# Altium PCB PCBProjet.PcbDoc
Units mm, origin at the board's own origin, x right, y up, seen from the top; angles counter-clockwise.
Board outline 70.61 x 70.61 mm, 2 copper layers (Top Layer, Bottom Layer); 34 components, 27 nets, 125 pads, 0 vias.
Unrouted connection lines stored in the file: 80.
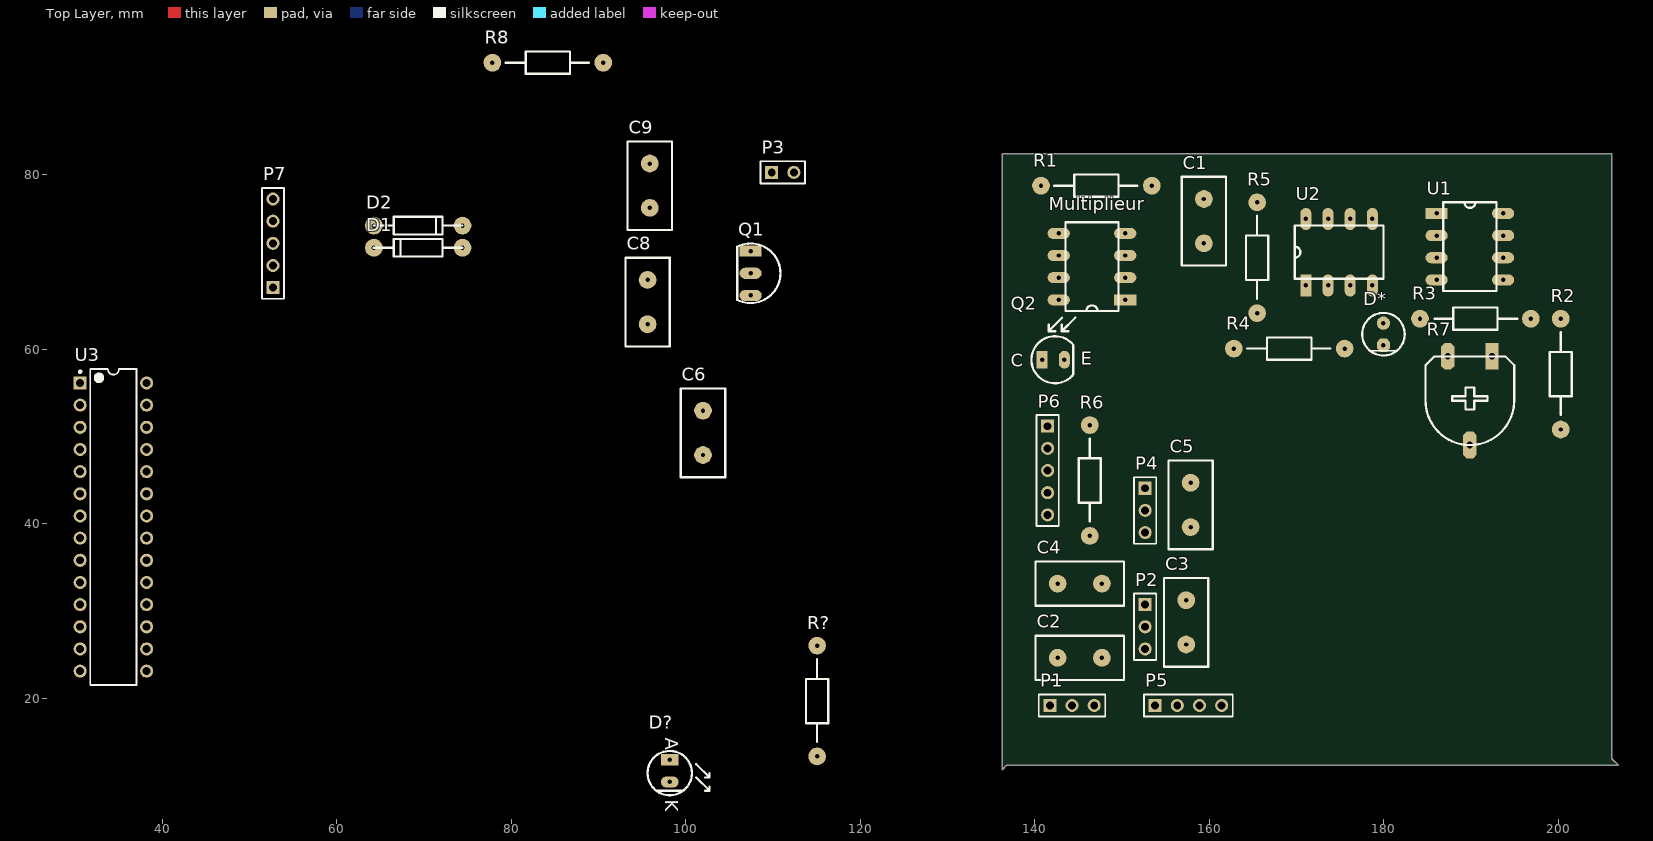
[diagram p0: Top Layer view]
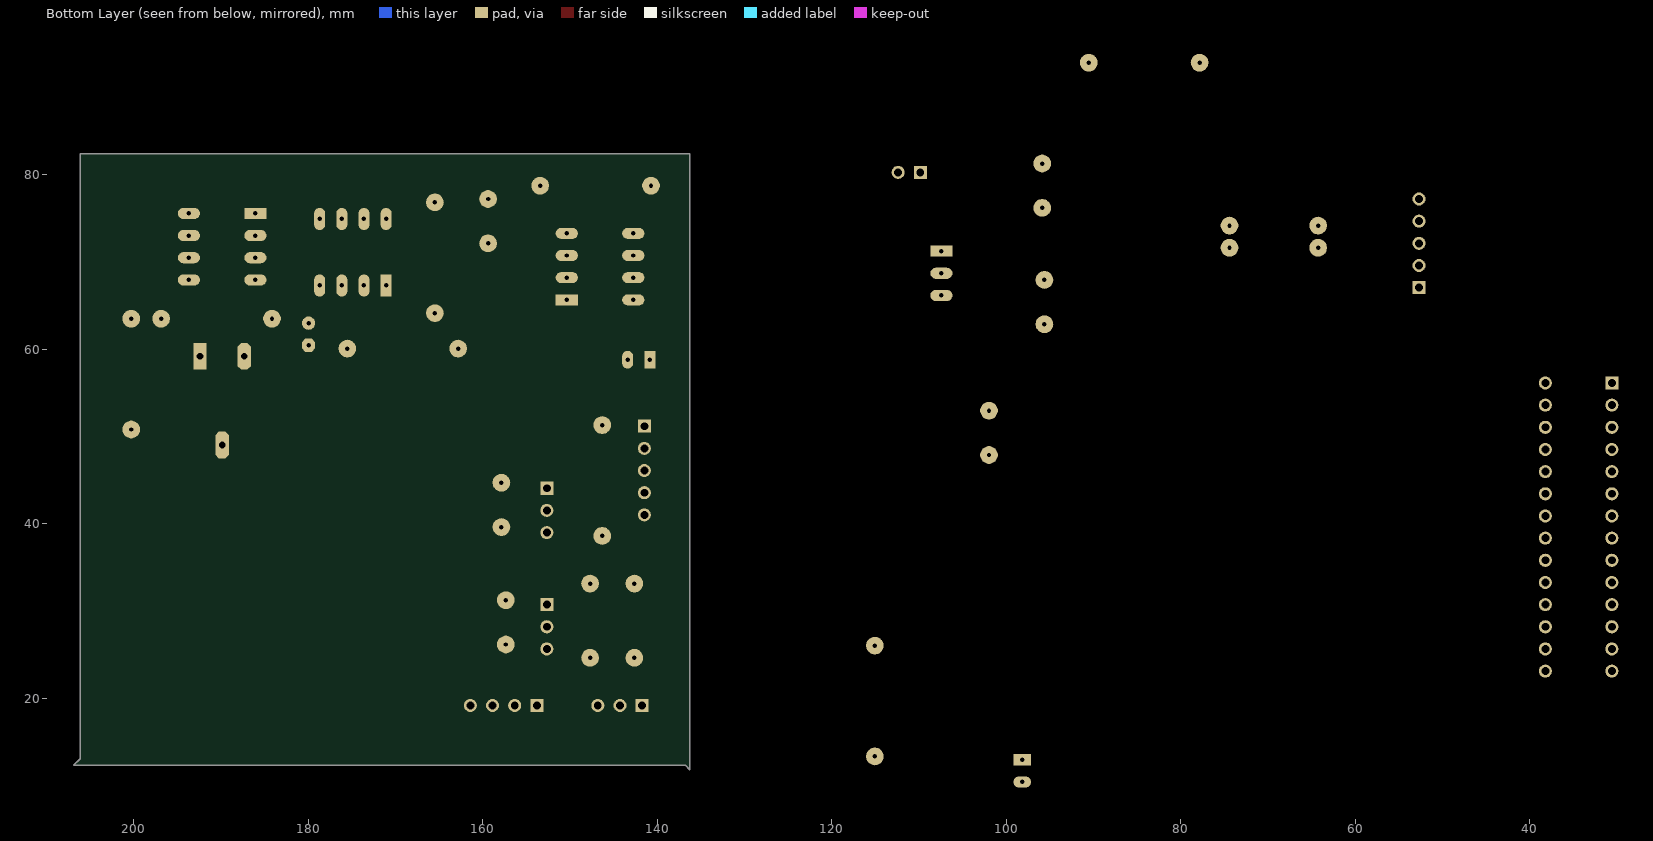
[diagram p1: Bottom Layer view, seen from below]

## Layer stack, top to bottom
Top Layer: signal copper 0.0356
Dielectric: dielectric 0.32, FR-4, Dk 4.8
Bottom Layer: signal copper 0.0356

## Board outline
136.271,82.423 136.271,11.811 136.779,12.319 206.883,12.319 206.121,13.081 206.121,82.423

## Design rules (kind name [scope] priority, off if disabled: settings)
Clearance [All] p1: gap=0.508
PolygonConnect [All] p1: connectstyle=Relief reliefconductorwidth=0.254 reliefentries=4 polygonreliefangle="90 Angle" airgapwidth=0.254
RoutingLayers [All] p1: top layer_v5=FALSE bottom layer_v5=TRUE
RoutingVias [All] p1: holewidth=0.711 width=1.27 viastyle="Through Hole" minholewidth=0.711 minwidth=1.27 maxholewidth=0.711 maxwidth=1.27
SilkscreenOverComponentPads [All] p1: minsilkscreentomaskgap=0.254
SolderMaskExpansion [All] p1: expansion=0.102
Width [All] p1: maxlimit=0.762 minlimit=0.762 preferedwidth=0.762
26 further rules are at their usual default settings.

## Components (designator, comment, footprint, x,y, rotation, side; value= is the part's Value field where it differs from the comment)
C1 "Cap2" CAPA2 159.385,72.136 r90 top
C2 "Cap2" CAPA2 147.701,24.638 r180 top
C3 "Cap2" CAPA2 157.353,31.242 r270 top
C4 "Cap2" CAPA2 147.701,33.147 r180 top
C5 "Cap2" CAPA2 157.861,44.704 r270 top
C6 "Cap2" CAPA2 101.981,47.879 r90 top
C8 "Cap2" CAPA2 95.631,62.865 r90 top
C9 "Cap2" CAPA2 95.885,76.2 r90 top
D1 "Diode 1N4001" Ddiode 64.262,71.628 r0 top
D2 "Diode 1N4001" Ddiode 74.422,74.168 r180 top
D* "LED" Led_5mm 179.832,61.722 r270 top
D? "Led" LED 98.171,12.954 r270 top
Multiplieur "AD633JN" DIP8 150.368,65.659 r180 top
P1 "Header 3" HDR1X3 141.732,19.177 r0 top
P2 "Regul5" HDR1X3 152.654,30.734 r270 top
P3 "Laser" HDR1X2 109.855,80.264 r0 top
P4 "Regul33" HDR1X3 152.654,44.069 r270 top
P5 "XBee" HDR1X4 153.797,19.177 r0 top
P6 "Moteur" HDR1X5 141.478,51.181 r270 top
P7 "PICKIT" HDR1X5 52.705,67.056 r90 top
Q1 "2N3904" TO92 107.442,71.247 r270 top
Q2 "TEFT4300" Photo 140.843,58.801 r0 top
R1 "Res2" res5_1/4W 140.716,78.74 r0 top
R2 "Res2" res5_1/4W 200.279,63.5 r270 top
R3 "Res2" res5_1/4W 196.85,63.5 r180 top
R4 "Res2" res5_1/4W 162.814,60.071 r0 top
R5 "Res2" res5_1/4W 165.481,76.835 r270 top
R6 "Res2" res5_1/4W 146.304,51.308 r270 top
R7 "RPot" AJUSTABLE 192.405,59.182 r180 top
R8 "Res2" res5_1/4W 77.851,92.837 r0 top
R? "Res2" res5_1/4W 115.062,26.035 r270 top
U1 "LM311N" DIP8 186.055,75.565 r0 top
U2 "TL082CN" DIP8 171.069,67.31 r90 top
U3 "DSPIC33FJ128MC802-I/SP" SPDIP300-SP28 34.417,39.624 r0 top

## Footprints (in the part's own frame and the unit in brackets; to place one, negate y for a bottom-side part, rotate by r counter-clockwise, add the part's x,y. Pads: shape width x height; smd on the part's side, far side on the other; paste and mask are expansions set on the pad)
AJUSTABLE [mil]
  rect 60x120 hole 30: 1(0,0)
  oct 60x120 hole 30: 2(100,400) 3(200,0)
  silkscreen extent -100,0 300,400
CAPA2 [mil]
  round 80 hole 20: 1(0,0) 2(200,0)
  silkscreen extent -100,-100 300,100
Ddiode [mil]
  round 80 hole 20: A(400,0) K(0,0)
  silkscreen extent 0,-40 400,40
DIP8 [mil]
  rect 100x50 hole 20: 1(0,0)
  oval 100x50 hole 20: 2(0,-100) 3(0,-200) 4(0,-300) 5(300,-300) 6(300,-200) 7(300,-100) 8(300,0)
  silkscreen extent 30,-350 270,50
HDR1X2 [mm] "Connector; Header; 2 Position"
  rect 1.5x1.5 hole 0.9: 1(0,0)
  round 1.5 hole 0.9: 2(2.54,0)
  silkscreen extent -1.27,-1.27 3.81,1.27
HDR1X3 [mm] "Connector; Header; 3 Position"
  rect 1.5x1.5 hole 0.9: 1(0,0)
  round 1.5 hole 0.9: 2(2.54,0) 3(5.08,0)
  silkscreen extent -1.27,-1.27 6.35,1.27
HDR1X4 [mm] "Connector; Header; 4 Position"
  rect 1.5x1.5 hole 0.9: 1(0,0)
  round 1.5 hole 0.9: 2(2.54,0) 3(5.08,0) 4(7.62,0)
  silkscreen extent -1.27,-1.27 8.89,1.27
HDR1X5 [mm] "Connector; Header; 5 Position"
  rect 1.5x1.5 hole 0.9: 1(0,0)
  round 1.5 hole 0.9: 2(2.54,0) 3(5.08,0) 4(7.62,0) 5(10.16,0)
  silkscreen extent -1.27,-1.27 11.43,1.27
LED [mil]
  rect 50x80 hole 20: 1(0,0)
  oval 50x80 hole 20: 2(100,0)
  silkscreen extent -40,-100 160,180
Led_5mm [mil]
  round 60 hole 20: 1(-50,5)
  oct 60x60 hole 20: 2(50,5)
  silkscreen extent -96,-91 96,101
Photo [mil]
  rect 50x80 hole 20: 1(0,0)
  oval 50x80 hole 20: 2(100.39,0)
  silkscreen extent -48,-106 150,190
res5_1/4W [mil]
  round 80 hole 20: 1(0,0) 2(500,0)
  silkscreen extent 60,-50 435,50
SPDIP300-SP28 [mm] "DIP, 28-Leads, Row Spacing 7.62mm, Pitch 2.54mm, Body 34.9x6.8mm"
  rect 1.5x1.5 hole 0.9: 1(-3.81,16.51)
  round 1.5 hole 0.9: 2(-3.81,13.97) 3(-3.81,11.43) 4(-3.81,8.89) 5(-3.81,6.35) 6(-3.81,3.81) 7(-3.81,1.27) 8(-3.81,-1.27) 9(-3.81,-3.81) 10(-3.81,-6.35) 11(-3.81,-8.89) 12(-3.81,-11.43) 13(-3.81,-13.97) 14(-3.81,-16.51) 15(3.81,-16.51) 16(3.81,-13.97) 17(3.81,-11.43) 18(3.81,-8.89) 19(3.81,-6.35) 20(3.81,-3.81) 21(3.81,-1.27) 22(3.81,1.27) 23(3.81,3.81) 24(3.81,6.35) 25(3.81,8.89) 26(3.81,11.43) 27(3.81,13.97) 28(3.81,16.51)
  silkscreen extent -3.93,-18.1 2.65,18.1, body extent -3.55,-18.1 3.55,18.1, height 5.08
TO92 [mil]
  rect 50x100 hole 20: 1(0,0)
  oval 50x100 hole 20: 2(100,0) 3(200,0)
  silkscreen extent -34,-60 234,134

## Part data
C1 C2 C3 C4 C5 C6 C8 C9: "Capacitor"
D1 D2: "1 Amp General Purpose Rectifier"
D?: "LED"
Multiplieur: "Low-Cost Analog Multiplier"
P1: "Header, 3-Pin"
P2 P4: library part "Header 3", "Header, 3-Pin"
P3: library part "Header 2", "Header, 2-Pin"
P5: library part "Header 4", "Header, 4-Pin"
P6 P7: library part "Header 5", "Header, 5-Pin"
Q1: "NPN General Purpose Amplifier"
Q2: "NPN Phototransistor"
R1 R2 R3 R4 R5 R6 R8 R?: "Resistor"
R7: "Potentiometer"
U1: "Voltage Comparator"
U2: "General-Purpose J-FET Dual Operational Amplifier"
U3: "High-Performance 16-bit Digital Signal Controller, 128 KB Flash, 16 KB RAM, 28-Pin SPDIP, Industrial Temperature"

## Nets (pads, with @x,y where several pads share a name; then routed paths per layer and width w, separated by ;. In a path a pad name is that pad's centre, name@x,y a point inside that pad or via, vN(x,y) a via of type N, cw(c..) or ccw(c..) an arc to the next point about the centre after c; other vN are vias at no path point)
+3V: C5.1 C9.2 D2.K P4.2 Q1.3 R2.2 R8.2 R?.2 U3.13 U3.28
+5V: C3.1 P2.2 P5.2
+9V: C2.2 C4.2 Multiplieur.1 Multiplieur.3 Multiplieur.6 P1.2 P2.1 P4.1 R6.2 U2.3
+18V: Multiplieur.8 P1.1 P6.5 Q2.1 R7.1 U1.8 U2.8
CLKMOTEUR: P6.1 U3.25
DEBUG: D?.2 U3.11
DIN: P5.4 U3.7
DOUT: P5.3 U3.6
ENTREECAPTEUR: Multiplieur.2 Q2.2 R6.1
NetC1_2: C1.2 R1.2 R5.1
NetC6_2: C6.2 U3.20
NetC8_1: C8.1 R8.1 U3.1
NetD1_2: D1.K P7.3
NetD2_1: D2.A P7.4
NetD*_1: D*.1 R3.2
NetD?_1: D?.1 R?.1
NetMultiplieur_7: Multiplieur.7 R1.1
NetP3_1: P3.1 Q1.1
NetR4_1: R4.1 R5.2 U2.2
NetR4_2: R4.2 U1.2 U2.1
NetR7_2: R7.2 U1.3
PCLR: C1.1 C2.1 C3.2 C4.1 C5.2 C6.1 C8.2 C9.1 D1.A D*.2 Multiplieur.5 P1.3 P2.3 P3.2 P4.3 P5.1 P6.4 P7.5 R7.3 U1.1 U1.4 U2.4 U3.8 U3.19 U3.27
PGC: P7.1 U3.5
PGD: P7.2 U3.4
PWMMOTEUR: P6.3 U3.26
SIGNALSYNCHRONE: Multiplieur.4 Q1.2 U3.24
SORTIEPIC: R2.1 R3.1 U1.7 U3.2
pads on no net: P6.2 U1.5 U1.6 U2.5 U2.6 U2.7 U3.3 U3.9 U3.10 U3.12 U3.14 U3.15 U3.16 U3.17 U3.18 U3.21 U3.22 U3.23

## Text inside footprints (layer, text, board x,y; h text height)
D?: Top Overlay "K" at 97.663,8.382 h1.52 r270; Top Overlay "A" at 97.663,15.494 h1.52 r270
Q2: Top Overlay "C" at 137.243,58.001 h1.52; Top Overlay "E" at 145.293,58.226 h1.52